# EAGLE board zloshnikrev1 (EAGLE 6.1)
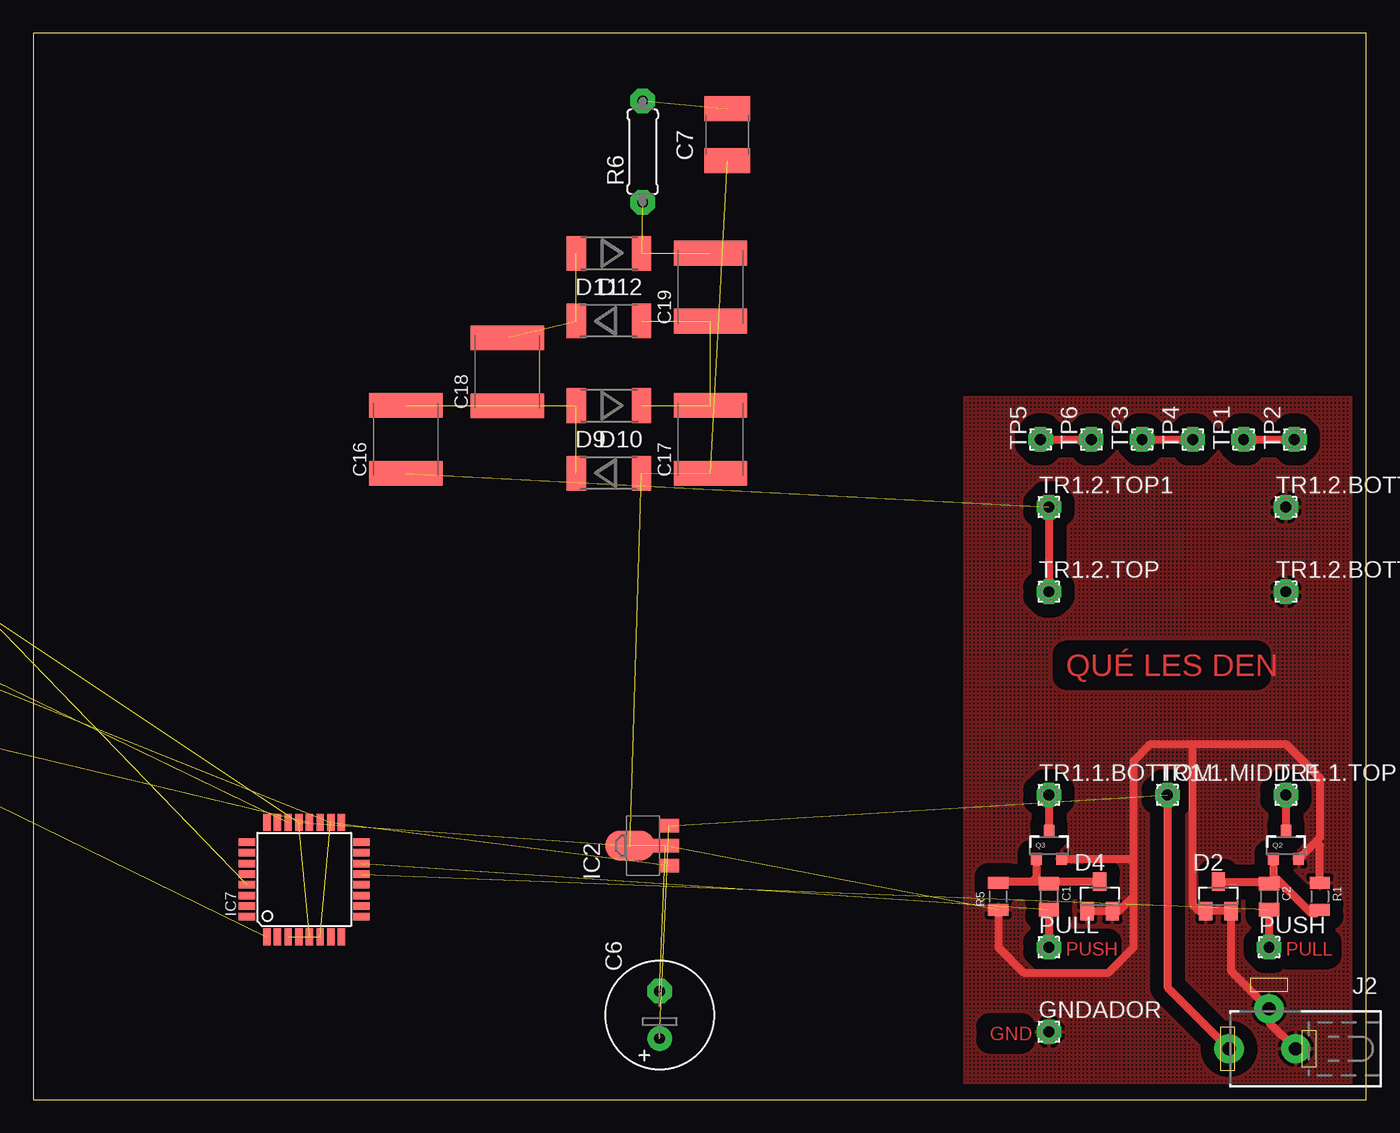
[diagram p0: board, top side]

Size 100 x 80 mm. Coordinates in mm from the lower left corner, seen from the top.
Outline: 0,0 100,0 100,80 0,80 0,0
Copper layers (1*16): Top 0.035mm / dielectric 1.5mm / Bottom 0.035mm
Design rules: minimum track width 10mil, minimum drill 24mil, track to track 8mil, track to pad 8mil, pad to pad 8mil, via to via 8mil, smd to smd 8mil, copper to edge 40mil, drill to drill 8mil, minimum pad ring 10mil, minimum via ring 8mil, stop-mask expansion 4mil, vias tented up to drill 0mil, thermal gap 10mil

## Footprints (pad centres in the part's own frame; a part is rotated, then mirrored left to right if it is on the bottom)
D/7343-31R = smd 2.55 x 2.7: + 3.175,0; - -3.175,0
C0805S = smd 1.016 x 1.524: 1 -0.977,0; 2 0.977,0
C0603K = smd 1.05 x 1.08: 1 -0.875,0; 2 0.875,0
SMC_B = smd 1.6 x 2.4: + -1.5,0; - 1.5,0
E3,5-8 = drill 0.813 pad 1.6: + -1.778,0 | drill 0.813 pad 1.6 octagon: - 1.778,0
C1812 = smd 1.9 x 3.4: 1 -1.95,0; 2 1.95,0
C2220K = smd 1.85 x 5.5: 1 -2.55,0; 2 2.55,0
SOT23 = smd 1 x 1.4: 1 -0.95,-1.1; 2 0.95,-1.1; 3 0,1.1
SOT23@1 = smd 1 x 1.4: 1 -0.95,-1.1; 2 0.95,-1.1; 3 0,1.1
SOD87 = smd 1.45 x 2.6: 1 -2.445,0; 2 2.445,0
1,6/0,8 = drill 0.813 pad 1.6 octagon: 1 0,0
SOT89 = smd 1 x 1.5: 1 -1.499,-1.981; 3 1.499,-1.981 | smd 1 x 2: 2 0,-1.727 | smd 2.2 x 3.7: 2@1 0,0.94
TQFP32-08 = smd 1.27 x 0.559: 1 -4.293,2.8; 2 -4.293,2; 3 -4.293,1.2; 4 -4.293,0.4; 5 -4.293,-0.4; 6 -4.293,-1.2; 7 -4.293,-2; 8 -4.293,-2.8; 17 4.293,-2.8; 18 4.293,-2; 19 4.293,-1.2; 20 4.293,-0.4; 21 4.293,0.4; 22 4.293,1.2; 23 4.293,2; 24 4.293,2.8 | smd 0.559 x 1.27: 9 -2.8,-4.293; 10 -2,-4.293; 11 -1.2,-4.293; 12 -0.4,-4.293; 13 0.4,-4.293; 14 1.2,-4.293; 15 2,-4.293; 16 2.8,-4.293; 25 2.8,4.293; 26 2,4.293; 27 1.2,4.293; 28 0.4,4.293; 29 -0.4,4.293; 30 -1.2,4.293; 31 -2,4.293; 32 -2.8,4.293
DCJ-SMALL = drill 1 pad 2.184: 1 0,3; 2 3,0; 3 0,-2
SOT23-3 = smd 0.8 x 0.9: 1 -0.95,-1; 2 0.95,-1; 3 0,1.1
R0805-SVO = smd 0.9 x 1.524: 1 -1.027,0; 2 1.027,0
0207/7 = drill 0.813 octagon: 1 -3.81,0; 2 3.81,0
RESSMD-YC16 = smd 0.508 x 0.914: R1$1 -1.23,-0.821; R1$2 -1.2,0.851; R2$1 -0.4,-0.821; R2$2 -0.4,0.851; R3$1 0.4,-0.821; R3$2 0.4,0.851; R4$1 1.2,-0.821; R4$2 1.2,0.851
SW_IT1181 = smd 1.676 x 0.813: P$1 -3.61,0; P$2 3.61,0

## Placement (x,y rotation side)
220  [D/7343-31R]  -26.67,36.83 0 top  (outside the outline)
C1  33nF  [C0805S]  76.2,15.24 270 top
C2  33nF  [C0805S]  92.71,15.24 270 top
C3  100nF  [C0603K]  -45.72,36.83 0 top  (outside the outline)
C4  33nF  [C0805S]  -40.64,-2.54 0 top  (outside the outline)
C5  10uF  [SMC_B]  -34.29,38.1 0 top  (outside the outline)
C6  100/24V  [E3,5-8]  46.99,6.35 90 top
C7  0,01 1kV  [C1812]  52.07,72.39 90 top
C10  10uF  [SMC_B]  -39.37,38.1 0 top  (outside the outline)
C11  100nF  [C0603K]  -16.51,44.45 0 top  (outside the outline)
C12  1.0  [C0805S]  -34.29,44.45 0 top  (outside the outline)
C13  100nF  [C0603K]  -22.86,44.45 0 top  (outside the outline)
C16  0,01 1kV  [C2220K]  27.94,49.53 90 top
C17  0,01 1kV  [C2220K]  50.8,49.53 90 top
C18  0,01 1kV  [C2220K]  35.56,54.61 90 top
C19  0,01 1kV  [C2220K]  50.8,60.96 90 top
D1  BAT54C  [SOT23]  -48.26,-3.81 0 top  (outside the outline)
D2  BAT54C  [SOT23]  88.9,15.24 0 top
D3  BAT54S  [SOT23@1]  -19.05,38.1 0 top  (outside the outline)
D4  BAT54C  [SOT23]  80.01,15.24 0 top
D9  [SOD87]  43.18,46.99 0 top
D10  [SOD87]  43.18,52.07 180 top
D11  [SOD87]  43.18,58.42 0 top
D12  [SOD87]  43.18,63.5 180 top
GNDADOR  [1,6/0,8]  76.2,5.08 0 top
IC2  78L05F  [SOT89]  45.72,19.05 90 top
IC7  MEGA8-AI  [TQFP32-08]  20.32,16.51 90 top
J2  [DCJ-SMALL]  92.71,3.81 90 top
PULL  [1,6/0,8]  76.2,11.43 0 top
PUSH  [1,6/0,8]  92.71,11.43 0 top
Q1  IRLML2502  [SOT23-3]  -45.72,-10.16 0 top  (outside the outline)
Q2  IRLML2502  [SOT23-3]  93.98,19.05 0 top
Q3  IRLML2502  [SOT23-3]  76.2,19.05 0 top
R1  91K  [R0805-SVO]  96.52,15.24 270 top
R2  470K  [R0805-SVO]  -41.91,44.45 0 top  (outside the outline)
R3  4K7  [R0805-SVO]  -45.72,44.45 0 top  (outside the outline)
R4  000  [R0805-SVO]  -49.53,44.45 0 top  (outside the outline)
R5  91K  [R0805-SVO]  72.39,15.24 90 top
R6  100k  [0207/7]  45.72,71.12 90 top
R7  91K  [R0805-SVO]  -49.53,-10.16 0 top  (outside the outline)
R14  [RESSMD-YC16]  -34.29,53.34 0 top  (outside the outline)
R15  10K  [R0805-SVO]  -15.24,49.53 0 top  (outside the outline)
SW1  BUTTON-IT_1181  [SW_IT1181]  -27.94,53.34 0 top  (outside the outline)
TP1  [1,6/0,8]  90.81,49.53 90 top
TP2  [1,6/0,8]  94.61,49.53 90 top
TP3  [1,6/0,8]  83.19,49.53 90 top
TP4  [1,6/0,8]  87,49.53 90 top
TP5  [1,6/0,8]  75.56,49.53 90 top
TP6  [1,6/0,8]  79.38,49.53 90 top
TR1.1.BOTTOM  [1,6/0,8]  76.2,22.86 0 top
TR1.1.MIDDLE  [1,6/0,8]  85.09,22.86 0 top
TR1.1.TOP  [1,6/0,8]  93.98,22.86 0 top
TR1.2.BOTTOM  [1,6/0,8]  93.98,38.1 0 top
TR1.2.BOTTOM1  [1,6/0,8]  93.98,44.45 0 top
TR1.2.TOP  [1,6/0,8]  76.2,38.1 0 top
TR1.2.TOP1  [1,6/0,8]  76.2,44.45 0 top

## Library data of the parts
220 C1-C6 C10-C13 R1-R5 R7 R15 = rcl
C7 C16-C19 R6 = 0-rcl
D1-D4 = diode
D9-D12 = semicon-smd-ipc
GNDADOR PULL PUSH TP1-TP6 TR1.1.BOTTOM TR1.1.MIDDLE TR1.1.TOP TR1.2.BOTTOM TR1.2.BOTTOM1 TR1.2.TOP TR1.2.TOP1 = wirepad
IC2 = linear
IC7 = atmel
J2 R14 SW1 = 0-svo
Q1-Q3 = xmaker

## Nets
+1KV: C7.2 R6.2
+5V: 220.+ C5.+ C10.+ C11.1 C13.2 D3.2 IC2.1 IC7.4 IC7.6 IC7.18 R15.2
+UB: C6.+ IC2.3 J2.1 TR1.1.MIDDLE.1
BTN+: IC7.28
BTNSET: IC7.27
D0: IC7.26
D1: IC7.24
D2: IC7.23
D3: IC7.25
DOT: IC7.1 R4.1 R4.2
FBACK: C12.1 D3.3 IC7.22 R2.2 R3.2
FILAMENT: Q1.3
GND: 220.- C3.2 C5.- C6.- C7.1 C10.- C11.2 C12.2 C13.1 C17.1 D1.1 D1.2 D2.1 D2.2 D3.1 D4.1 D4.2 D9.2 GNDADOR.1 IC2.2 IC2.2@1 IC7.3 IC7.5 IC7.21 J2.2 J2.3 Q1.2 Q2.2 Q3.2 R1.1 R3.1 R5.1 R7.1 SW1.P$1 TR1.2.BOTTOM1.1 TR1.2.BOTTOM.1
HV+: R2.1
MISO: IC7.16
MOSI: IC7.15
N$1: C1.1 D4.3 Q3.1 R5.2
N$2: Q2.3 TR1.1.TOP.1
N$3: C2.1 D2.3 Q2.1 R1.2
N$4: Q3.3 TR1.1.BOTTOM.1
N$5: C3.1 IC7.20
N$6: C16.2 C18.1 D9.1 D10.2
N$7: TP1.1 TP2.1
N$8: TP3.1 TP4.1
N$9: TP5.1 TP6.1
N$10: C4.1 D1.3 Q1.1 R7.2
N$12: C18.2 D11.1 D12.2
N$13: C17.2 C19.1 D10.1 D11.2
N$15: C19.2 D12.1 R6.1
N$16: C16.1 TR1.2.TOP1.1 TR1.2.TOP.1
N$35: IC7.12
PULL: C1.2 IC7.14 PULL.1
PUSH: C2.2 IC7.13 PUSH.1
PWM_FILAMENT: C4.2
RESET#: IC7.29 R15.1 SW1.P$2
RXD: IC7.30
SCK: IC7.17
TXD: IC7.31

## Tracks (layer width: path | path; a pad name or v marks a point on that pad's centre or on a via)
+1KV  (1 unrouted)
+5V  (10 unrouted)
+UB  (2 unrouted)
  Top 0.61: TR1.1.MIDDLE.1 85.09,8.43 J2.1
DOT  (2 unrouted)
FBACK  (4 unrouted)
GND  (23 unrouted)
  Top 0.61: D4.1 D4.2 81.45,14.14 82.55,15.24 | J2.3 92.71,5.81 J2.2 89.85,9.67 D2.2 D2.1 87.46,14.14 87,14.61 87,26.67 | 82.55,15.24 82.55,17.78 | 82.55,17.78 82.55,25.4 83.82,26.67 87,26.67 | 87,26.67 93.98,26.67 96.52,24.13 96.52,19.64 96.22,19.34 | 96.22,19.34 Q2.2 | Q3.2 82.28,18.05 82.55,17.78 | R1.1 96.52,19.05 96.22,19.34 | R5.1 72.39,11.43 74.3,9.53 80.64,9.53 82.55,11.43 82.55,15.24
  pour Top (isolate 1.016, hatched): 69.85,52.7 99.06,52.7 99.06,1.27 69.85,1.27
N$1
  Top 0.61: D4.3 76.32,16.34 | 76.32,16.34 C1.1 76.15,16.27 | 76.32,16.34 74.93,16.34 | 74.93,16.34 72.46,16.34 R5.2 | Q3.1 75.25,16.66 74.93,16.34
N$2
  Top 0.61: TR1.1.TOP.1 Q2.3
N$3
  Top 0.61: Q2.1 93.03,16.54 | 93.03,16.54 C2.1 92.59,16.34 D2.3 | 93.03,16.54 93.32,16.54 95.89,13.97 96.28,13.97 R1.2
N$4
  Top 0.61: TR1.1.BOTTOM.1 Q3.3
N$5  (1 unrouted)
N$6  (3 unrouted)
N$7
  Top 0.61: TP1.1 TP2.1
N$8
  Top 0.61: TP3.1 TP4.1
N$9
  Top 0.61: TP5.1 TP6.1
N$10  (3 unrouted)
N$12  (2 unrouted)
N$13  (3 unrouted)
N$15  (2 unrouted)
N$16  (1 unrouted)
  Top 0.61: TR1.2.TOP1.1 TR1.2.TOP.1
PULL  (1 unrouted)
  Top 0.61: C1.2 PULL.1
PUSH  (1 unrouted)
  Top 0.61: C2.2 PUSH.1
RESET#  (2 unrouted)

## Text on the board
Top: QUÉ LES DEN | PUSH | PULL | GND